# EAGLE board APU_Motherboard_Footprint (EAGLE 9.7.0)
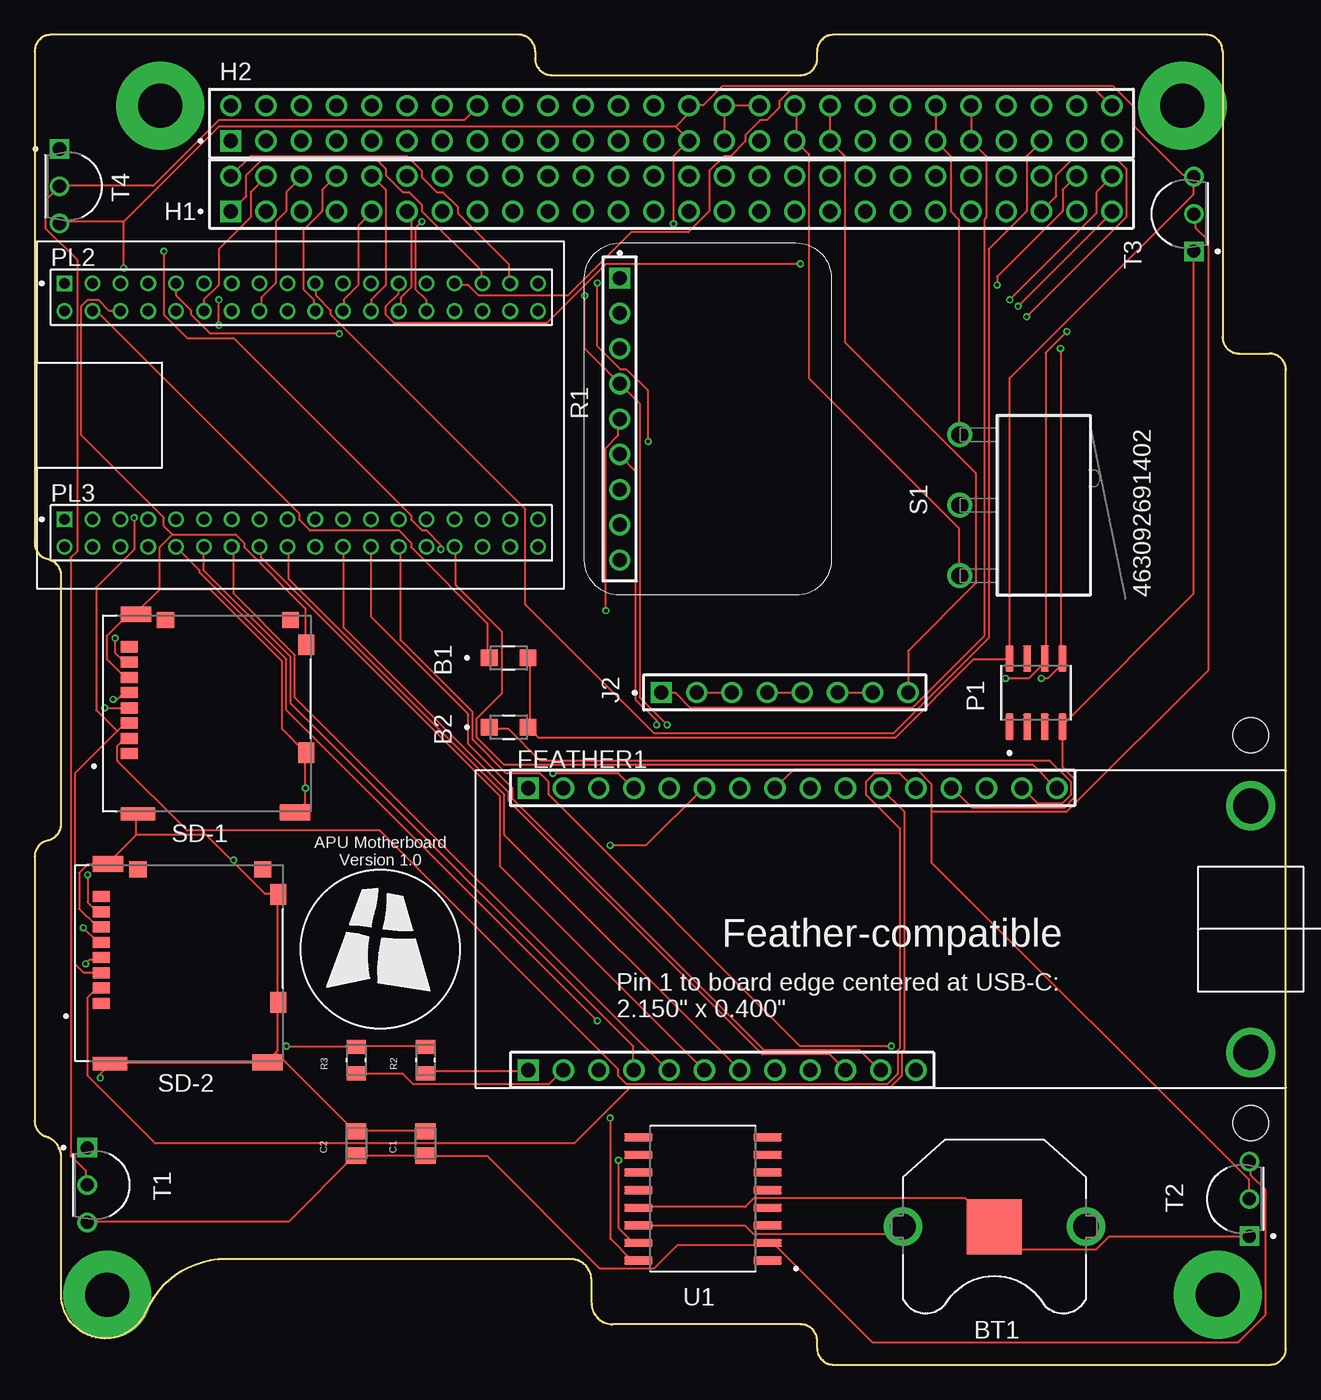
[diagram p0: board, top side]
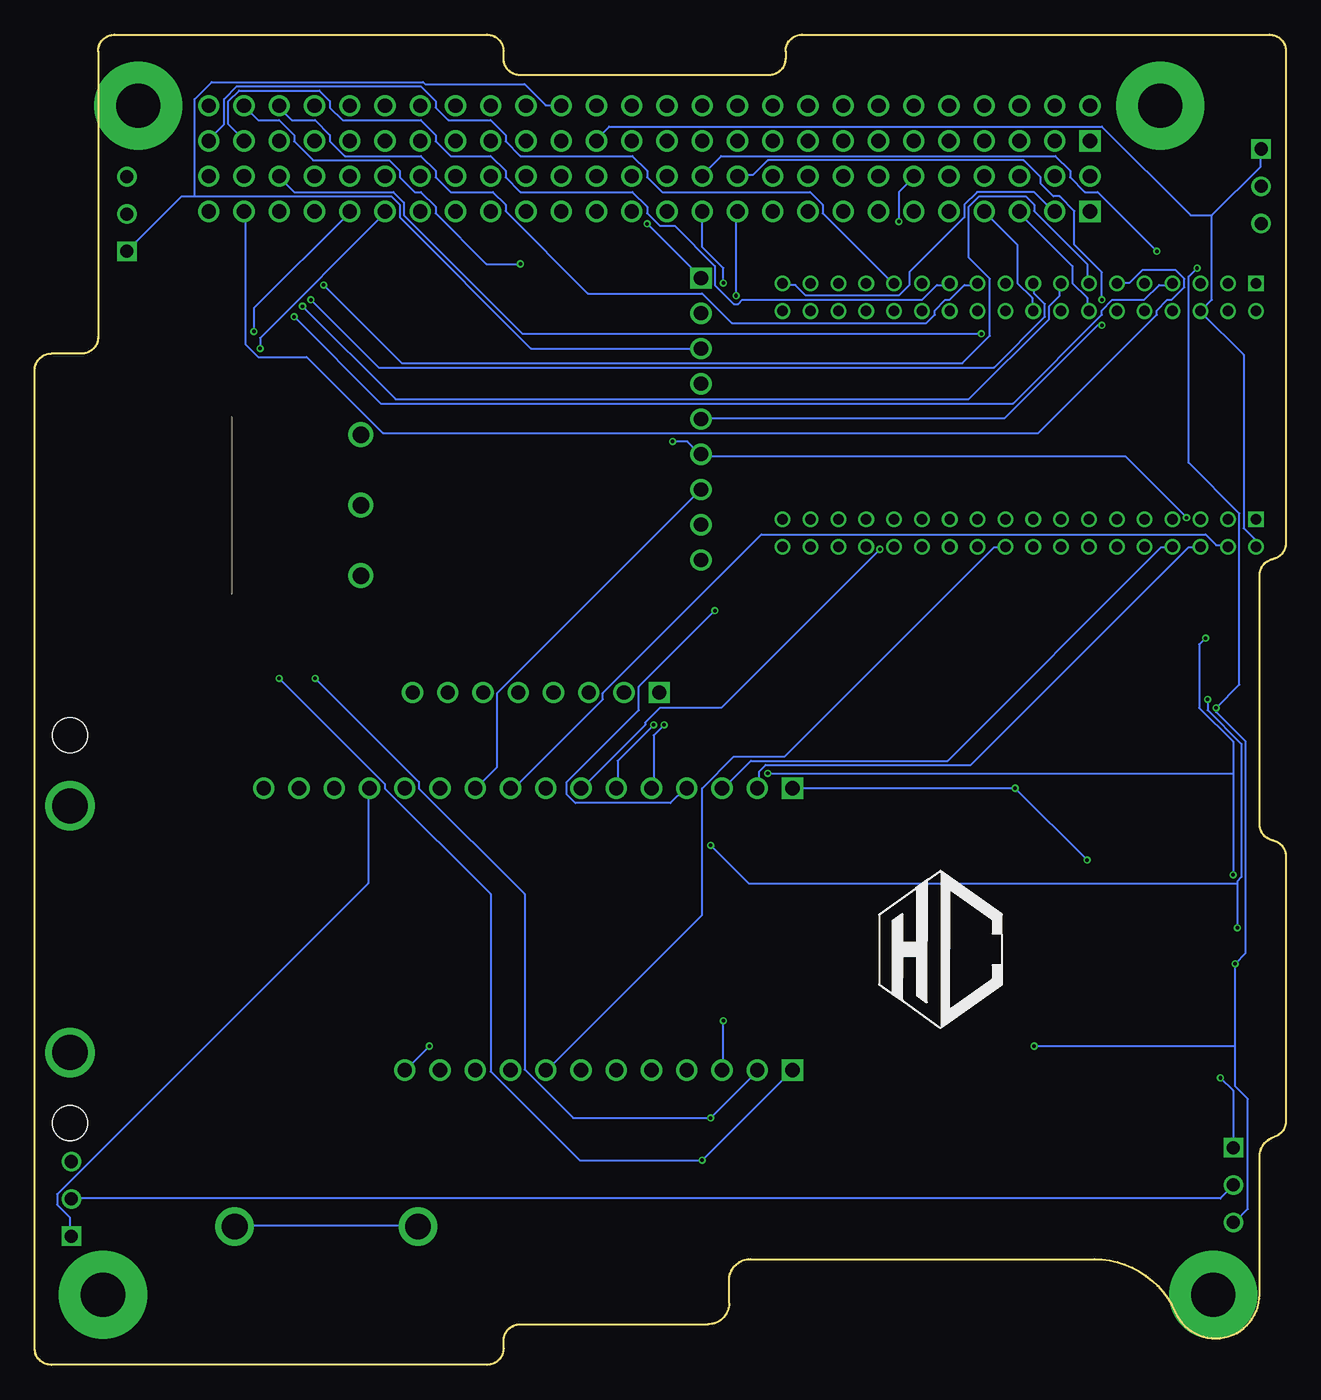
[diagram p1: board, bottom side, seen from below]

Size 90.17 x 95.89 mm. Coordinates in mm from the lower left corner, seen from the top.
Outline: 40.13,4.45 arc90 41.65,2.92 55.19,2.92 arc-90 56.39,1.73 56.39,1.19 arc90 57.58,0 88.98,0 arc90 90.17,1.19 90.17,71.7 arc90 88.98,72.9 86.79,72.9 arc-90 85.6,74.09 85.6,94.69 arc90 84.4,95.88 57.58,95.88 arc90 56.39,94.69 56.39,94.16 arc-90 55.19,92.96 37.26,92.96 arc-90 36.07,94.16 36.07,94.69 arc90 34.87,95.88 1.19,95.88 arc90 0,94.69 0,59.25 arc78 0.95,58.08 arc-78 1.91,56.91 1.91,38.98 arc-78 0.95,37.81 arc78 0,36.64 0,17.58 arc73 0.84,16.44 arc-73 1.91,14.99 1.91,5.08 arc156 7.99,3.81 arc-66 13.81,7.62 38.61,7.62 arc-90 40.13,6.1 40.13,4.45
Copper layers (1*16): Top 0.035559375mm / dielectric 1.6mm / Bottom 0.035559375mm
Design rules "oshpark-2layer": minimum track width 6mil, minimum drill 10mil, track to track 6mil, track to pad 6mil, pad to pad 6mil, via to via 6mil, smd to smd 6mil, copper to edge 15mil, drill to drill 6mil, minimum pad ring 5mil, minimum via ring 5mil, stop-mask expansion 2.5mil, vias tented up to drill 0mil, thermal gap 10mil

## Footprints (pad centres in the part's own frame; a part is rotated, then mirrored left to right if it is on the bottom)
PMEG120G10ELRX = smd 1.2 x 1.2: 1 -1.4,0; 2 1.4,0
BAT_BK-890 = smd 3.96 x 3.96: - 0,0 | drill 1.85: S1+ -6.6,0; S2+ 6.6,0
CAPC2012X94N = smd 1.16 x 1.47: 1 -0.88,0; 2 0.88,0
FEATHER = drill 1.02 pad 1.37 square: B1 0,0; T1 0,20.32 | drill 1.02 pad 1.37: B2 2.54,0; B3 5.08,0; B4 7.62,0; B5 10.16,0; B6 12.7,0; B7 15.24,0; B8 17.78,0; B9 20.32,0; B10 22.86,0; B11 25.4,0; B12 27.94,0; T2 2.54,20.32; T3 5.08,20.32; T4 7.62,20.32; T5 10.16,20.32; T6 12.7,20.32; T7 15.24,20.32; T8 17.78,20.32; T9 20.32,20.32; T10 22.86,20.32; T11 25.4,20.32; T12 27.94,20.32; T13 30.48,20.32; T14 33.02,20.32; T15 35.56,20.32; T16 38.1,20.32 | drill 2.54: MT1 52.07,19.05; MT2 52.07,1.27 | hole 2.54: 52.07,24.13; 52.07,-3.81
SAMTEC_ESQ-126-37-G-D--NUMBERED-FOR-CUBESAT-BUS = drill 1.02 pad 1.37 square: 01 0,0 | drill 1.02 pad 1.37: 02 0,2.54; 03 2.54,0; 04 2.54,2.54; 05 5.08,0; 06 5.08,2.54; 07 7.62,0; 08 7.62,2.54; 09 10.16,0; 10 10.16,2.54; 11 12.7,0; 12 12.7,2.54; 13 15.24,0; 14 15.24,2.54; 15 17.78,0; 16 17.78,2.54; 17 20.32,0; 18 20.32,2.54; 19 22.86,0; 20 22.86,2.54; 21 25.4,0; 22 25.4,2.54; 23 27.94,0; 24 27.94,2.54; 25 30.48,0; 26 30.48,2.54; 27 33.02,0; 28 33.02,2.54; 29 35.56,0; 30 35.56,2.54; 31 38.1,0; 32 38.1,2.54; 33 40.64,0; 34 40.64,2.54; 35 43.18,0; 36 43.18,2.54; 37 45.72,0; 38 45.72,2.54; 39 48.26,0; 40 48.26,2.54; 41 50.8,0; 42 50.8,2.54; 43 53.34,0; 44 53.34,2.54; 45 55.88,0; 46 55.88,2.54; 47 58.42,0; 48 58.42,2.54; 49 60.96,0; 50 60.96,2.54; 51 63.5,0; 52 63.5,2.54
SAMTEC_TSW-108-05-G-S = drill 1.02 pad 1.37 square: 01 0,0 | drill 1.02 pad 1.37: 02 2.54,0; 03 5.08,0; 04 7.62,0; 05 10.16,0; 06 12.7,0; 07 15.24,0; 08 17.78,0
MT_125_250 = drill 3.175 pad 6.35: 1 0,0
SOIC127P600X175-8N = smd 1.9 x 0.6: 1 -2.455,1.905; 2 -2.455,0.635; 3 -2.455,-0.635; 4 -2.455,-1.905; 5 2.455,-1.905; 6 2.455,-0.635; 7 2.455,0.635; 8 2.455,1.905
TE_4-1734506-1 = drill 0.75 pad 1.1 square: 1 0,0 | drill 0.75 pad 1.1: 2 0,-2; 3 2.007,0; 4 2.007,-2; 5 4.013,0; 6 4.013,-2; 7 6.02,0; 8 6.02,-2; 9 8.026,0; 10 8.026,-2; 11 10.033,0; 12 10.033,-2; 13 12.04,0; 14 12.04,-2; 15 14.046,0; 16 14.046,-2; 17 16.053,0; 18 16.053,-2; 19 18.059,0; 20 18.059,-2; 21 20.066,0; 22 20.066,-2; 23 22.073,0; 24 22.073,-2; 25 24.079,0; 26 24.079,-2; 27 26.086,0; 28 26.086,-2; 29 28.092,0; 30 28.092,-2; 31 30.099,0; 32 30.099,-2; 33 32.106,0; 34 32.106,-2; 35 34.112,0; 36 34.112,-2
FRAM_ADAFRUIT_MB85RSMT = drill 1.02 pad 1.37 square: 01 -0.381,0 | drill 1.02 pad 1.37: 02 2.159,0; 03 4.699,0; 04 7.239,0; 05 9.779,0; 06 12.319,0; 07 14.859,0; 08 17.399,0; 09 19.939,0
RESC2012X65N = smd 1.01 x 1.38: 1 -0.95,0; 2 0.95,0
463092691402 = drill 1.2: 1 -5.08,0; 2 0,0; 3 5.08,0
MOLEX_503182-1852 = smd 0.8 x 1.24: 1 -2.9,6.355; 2 -1.8,6.355; 3 -0.7,6.355; 4 0.4,6.355; 5 1.5,6.355; 6 2.6,6.355; 7 3.7,6.355; 8 4.8,6.355 | smd 1.16 x 1.2: DT 6.74,-5.275 | smd 0.95 x 2.5: P1 -7.245,5.725 | smd 1.15 x 2.2: P2 7.145,5.875; P3 -7.145,-5.605 | smd 1.5 x 1.15: P4 -2.84,-6.4; P5 4.94,-6.4 | smd 1.16 x 1.25: SW 6.74,3.725
DS18B20+T&R = drill 0.94 pad 1.41 square: 1 -2.69,-1.37 | drill 0.94 pad 1.41: 2 0,-1.37; 3 2.69,-1.37
SOIC127P1032X265-16N = smd 2.05 x 0.59: 1 -4.655,4.445; 2 -4.655,3.175; 3 -4.655,1.905; 4 -4.655,0.635; 5 -4.655,-0.635; 6 -4.655,-1.905; 7 -4.655,-3.175; 8 -4.655,-4.445; 9 4.655,-4.445; 10 4.655,-3.175; 11 4.655,-1.905; 12 4.655,-0.635; 13 4.655,0.635; 14 4.655,1.905; 15 4.655,3.175; 16 4.655,4.445

## Placement (x,y rotation side)
B1  DIO_PMEG4030ER,115  [PMEG120G10ELRX]  34.16,50.96 0 top
B2  PMEG120G10ELRX  [PMEG120G10ELRX]  34.16,45.96 0 top
BT1  BK-890  [BAT_BK-890]  69.16,9.96 180 top
C1  08053C104KAT2A  [CAPC2012X94N]  28.16,15.96 90 top
C2  08053C105KAT2A  [CAPC2012X94N]  23.16,15.96 90 top
FEATHER1  FEATHER  [FEATHER]  35.56,21.24 0 top
H1  CSK-H1  [SAMTEC_ESQ-126-37-G-D--NUMBERED-FOR-CUBESAT-BUS]  14.13,83.14 0 top
H2  CSK-H2  [SAMTEC_ESQ-126-37-G-D--NUMBERED-FOR-CUBESAT-BUS]  14.13,88.22 0 top
J2  TSW-108-05-G-S  [SAMTEC_TSW-108-05-G-S]  45.16,48.46 0 top
MT1  MOUNTING_HOLE-125_250_ROUND  [MT_125_250]  5.24,5.04 0 top
MT2  MOUNTING_HOLE-125_250_ROUND  [MT_125_250]  85.25,5.04 0 top
MT3  MOUNTING_HOLE-125_250_ROUND  [MT_125_250]  9.05,90.76 0 top
MT4  MOUNTING_HOLE-125_250_ROUND  [MT_125_250]  82.71,90.76 0 top
P1  ATECC608A-SSHDA-B  [SOIC127P600X175-8N]  72.16,48.46 90 top
PL2  [TE_4-1734506-1]  2.16,77.96 0 top
PL3  [TE_4-1734506-1]  2.16,60.96 0 top
R1  FRAM_ADAFRUIT_MB85RSMT  [FRAM_ADAFRUIT_MB85RSMT]  42.16,77.96 270 top
R2  RMCF0805JT10K0  [RESC2012X65N]  28.16,21.96 90 top
R3  RMCF0805JT10K0  [RESC2012X65N]  23.16,21.96 90 top
S1  463092691402  [463092691402]  66.66,61.96 270 top
SD-1  503182-1852  [MOLEX_503182-1852]  13.16,46.96 90 top
SD-2  503182-1852  [MOLEX_503182-1852]  11.16,28.96 90 top
T1  DS18B20  [DS18B20+T&R]  5.16,12.96 270 top
T2  DS18B20  [DS18B20+T&R]  86.16,11.96 90 top
T3  DS18B20  [DS18B20+T&R]  82.16,82.96 90 top
T4  DS18B20  [DS18B20+T&R]  3.16,84.96 270 top
U1  DS3231M+TRL  [SOIC127P1032X265-16N]  48.16,11.96 180 top
U$1  [APU-LOGO]  24.91,29.96 0 top
U$2  [NATHANAEL-LOGO]  24.91,29.96 0 bottom

## Library data of the parts
B1 B2 FEATHER1 H1 H2 MT1-MT4 PL2 PL3 R1 T1-T4 = apu-csk-motherboard
BT1 = apu-csk-motherboard; AVAILABILITY: In Stock; DESCRIPTION: BATTERY RETAINER COIN PC PIN; MF: MPD; MP: BK-890; PACKAGE: DFN-12 MPD; PRICE: None; PURCHASE-URL: https://pricing.snapeda.com/search/part/BK-890/?ref=eda
C1 = apu-csk-motherboard; AVAILABILITY: In Stock; DESCRIPTION: 0.1 µF ±10% 25V Ceramic Capacitor X7R 0805 (2012 Metric); MF: AVX; MP: 08053C104KAT2A; PACKAGE: 2012 AVX; PRICE: None; PURCHASE-URL: https://pricing.snapeda.com/search/part/08053C104KAT2A/?ref=eda
C2 = apu-csk-motherboard; AVAILABILITY: In Stock; DESCRIPTION: 1 µF ±10% 25V Ceramic Capacitor X7R 0805 (2012 Metric); MF: AVX; MP: 08053C105KAT2A; PACKAGE: 2012 AVX; PRICE: None; PURCHASE-URL: https://pricing.snapeda.com/search/part/08053C105KAT2A/?ref=eda
J2 = apu-csk-motherboard; AVAILABILITY: In Stock; DESCRIPTION: TSW - Samtec 2.54mm Pin Header 8.51mm Overall Pin Length (05) - Fast Stock; MF: Samtec; MP: TSW-108-05-G-S; PACKAGE: None; PRICE: None; PURCHASE-URL: https://pricing.snapeda.com/search/part/TSW-108-05-G-S/?ref=eda
P1 = apu-csk-motherboard; AVAILABILITY: In Stock; DESCRIPTION: IC AUTHENTICATION CHIP 8SOIC; MF: Microchip Technology; MP: ATECC608A-SSHDA-B; PACKAGE: SOIC-8 Microchip Technology; PRICE: None; PURCHASE-URL: https://pricing.snapeda.com/search/part/ATECC608A-SSHDA-B/?ref=eda
R2 R3 = apu-csk-motherboard; AVAILABILITY: In Stock; DESCRIPTION: 10 kOhms ±5% 0.125W, 1/8W Chip Resistor 0805 (2012 Metric) Automotive AEC-Q200 Thick Film; MF: Stackpole Electronics Inc; MP: RMCF0805JT10K0; PACKAGE: 2012 Stackpole; PRICE: None; PURCHASE-URL: https://pricing.snapeda.com/search/part/RMCF0805JT10K0/?ref=eda
S1 = apu-csk-motherboard; AVAILABILITY: In Stock; DESCRIPTION: Basic / Snap Action Switches WS-MITV Micro Switch RA Psh Typ 80gf; MF: Würth Elektronik; MP: 463092691402; PACKAGE: None; PRICE: None; PURCHASE-URL: https://pricing.snapeda.com/search/part/463092691402/?ref=eda
SD-1 SD-2 = apu-csk-motherboard; AVAILABILITY: In Stock; DESCRIPTION: 10 (8 + 2) Position Card Connector Secure Digital - microSD™ Surface Mount, Right Angle Gold; MF: Molex; MP: 5031821852; PACKAGE: None; PRICE: None; PURCHASE-URL: https://pricing.snapeda.com/search/part/5031821852/?ref=eda
U1 = apu-csk-motherboard; AVAILABILITY: In Stock; DESCRIPTION: ±5ppm, I2C Real-Time Clock; MF: Analog Devices; MP: DS3231M+TRL; PACKAGE: SOIC-16 Maxim; PRICE: None; PURCHASE-URL: https://pricing.snapeda.com/search/part/DS3231M+TRL/?ref=eda
U$1 = APU-LOGO
U$2 = NATHANAEL-LOGO

## Nets
3.3V: B1.2 B2.2 C1.1 C2.1 H2.27 H2.28 P1.8 R1.01 R2.2 R3.2 SD-1.4 SD-2.4 T1.3 T2.3 T3.3 T4.3 U1.2
CIPO: FEATHER1.T4 H1.22 R1.05 SD-1.7 SD-2.7
COPI: FEATHER1.T5 H1.23 R1.06 SD-1.3 SD-2.3
CS-FLIR: FEATHER1.T7 H1.24
CS-FPGA: FEATHER1.T9 PL3.4
CS-FRAM: FEATHER1.T10 R1.07
CS-SD-1: FEATHER1.T12 SD-1.2
CS-SD-2: FEATHER1.T11 SD-2.2
D0: H2.47 PL2.19
D1: H2.48 PL2.21
D2: H2.49 PL2.23
D3: H2.50 PL2.25
DQ-TEMP: FEATHER1.T8 H2.16 T1.2 T2.2 T3.2 T4.2
FE_EN: FEATHER1.B11 PL3.24
FE_IO0: FEATHER1.B3 PL3.10
FE_IO1: FEATHER1.B4 PL3.12
FE_IO2: FEATHER1.B5 PL3.14
FE_IO9: FEATHER1.B6 PL3.16
FE_IO10: FEATHER1.B7 PL3.18
FE_IO11: FEATHER1.B8 PL3.20
FE_RESET: FEATHER1.T16 PL3.30
FE_V_BATT: FEATHER1.B12 PL3.26
FE_V_USB: FEATHER1.B10 PL3.22
FPGA3.3: B1.1 PL2.4
GND: BT1.- C1.2 C2.2 FEATHER1.T1 FEATHER1.T13 H2.29 H2.30 H2.32 P1.4 PL2.6 PL3.2 R1.03 SD-1.6 SD-1.P1 SD-1.P2 SD-1.P3 SD-1.P4 SD-1.P5 SD-2.6 SD-2.P1 SD-2.P2 SD-2.P3 SD-2.P4 SD-2.P5 T1.1 T2.1 T3.1 T4.1 U1.13
GPIO-0: H1.47 PL2.7
GPIO-1: H1.48 PL2.9
GPIO-2: H1.49 PL2.11
GPIO-3: H1.50 PL2.13
HSYNC: H2.52 PL2.29
INT: H1.02 PL2.33
LS_C: H2.43 H2.44 J2.01
LS_NC: H2.35 H2.36 J2.08
N$1: BT1.S1+ BT1.S2+ U1.14
N$3: J2.02 J2.03
N$4: J2.04 J2.05
N$5: J2.06 J2.07
PCLKO: H1.01 PL2.31
PW_DWN_L: H1.51 PL2.15
RBF_C: H2.41 H2.42 S1.1
RBF_NC: H2.33 H2.34 S1.3
RESET_L: H1.52 PL2.17
SCK: FEATHER1.T6 H1.21 R1.04 SD-1.5 SD-2.5
SCL: FEATHER1.B2 H1.43 P1.6 R3.1 U1.16
SDA: FEATHER1.B1 H1.41 P1.5 R2.1 U1.15
TRIG: H1.03 PL2.35
UC3.3: B2.1 FEATHER1.T15
UC_RXO: FEATHER1.T3 PL3.8
UC_TXO: FEATHER1.T2 PL3.6
USER15: H1.04 PL2.12
USER16: H1.05 PL2.14
USER17: H1.06 PL2.16
USER18: H1.07 PL2.18
USER19: H1.08 PL2.20
USER20: H1.09 PL2.22
USER21: H1.10 PL2.24
USER22: H1.11 PL2.26
USER23: H1.12 PL2.28
VSYNC: H2.51 PL2.27

## Tracks (layer width: path | path; a pad name or v marks a point on that pad's centre or on a via)
3.3V  (via drill 0.25)
  Top 0.152: 6.41,82.41 1.84,82.41 T4.3 | 6.41,82.41 13.27,89.27 46.18,89.27 | 46.18,89.27 47.1,88.35 H2.27 47.1,88.2 46.03,87.13 v46.03,82.26 | 46.18,89.27 47.1,90.18 47.1,90.64 H2.28 47.25,90.79 48.17,90.79 49.54,92.16 77.73,92.16 79.26,90.64 79.26,89.27 82.76,85.76 83.52,85.76 T3.3 83.52,85.61 83.52,84.39 70.26,71.13 70.26,51.01 P1.8 70.11,50.86 67.67,50.86 62.03,45.22 36.28,45.22 35.67,45.83 B2.2 35.67,45.98 35.67,50.86 B1.2 | R2.2 28.05,22.97 23.17,22.97 R3.2 23.02,22.97 v18.14,22.97 | v3.66,28.92 3.97,29.22 4.73,29.22 SD-2.4 | v5.04,47.36 6.71,47.36 SD-1.4 | T2.3 87.64,14.59 87.64,13.68 88.7,12.61 88.7,3.62 86.72,1.64 60.36,1.64 53.35,8.65 52.89,8.65 U1.2 52.74,8.65 46.34,8.65 44.66,6.97 40.7,6.97 32.62,15.05 28.2,15.05 C1.1 28.05,15.05 23.17,15.05 C2.1 23.02,15.05 18.3,10.32 3.82,10.32 T1.3 | v6.41,79.06 6.41,82.41
  Bottom 0.152: v46.03,82.26 42.22,78.45 R1.01 | 3.66,22.97 3.66,20.08 2.75,19.16 2.75,11.24 3.66,10.32 T1.3 | 3.66,22.97 v3.66,28.92 2.9,29.68 2.9,44.92 5.04,47.05 v5.04,47.36 3.36,49.03 3.36,61.38 7.02,65.03 7.02,78.45 v6.41,79.06 | 3.66,22.97 v18.14,22.97
CIPO  (via drill 0.25)
  Top 0.152: v3.82,35.32 3.82,33.34 4.43,32.73 4.73,32.73 SD-2.7 | v5.8,52.39 5.8,51.32 6.41,50.71 6.71,50.71 SD-1.7 | v41.16,54.37 41.16,66.1 42.07,67.02 42.07,68.08 R1.05 | v37.35,42.63 42.07,42.63 43.14,41.56 FEATHER1.T4 | v13.27,74.94 v13.27,76.77
  Bottom 0.152: 3.82,42.63 3.82,44.92 6.26,47.36 6.26,51.93 v5.8,52.39 | 3.82,42.63 v3.82,35.32 | v41.16,54.37 46.64,48.88 46.64,47.2 51.82,42.02 51.82,41.11 51.21,40.5 44.36,40.5 43.29,41.56 FEATHER1.T4 | v37.35,42.63 3.82,42.63 | v13.27,76.77 13.27,78.75 15.25,80.73 15.25,83.17 16.31,84.24 16.77,84.24 17.69,85.15 17.69,85.61 18.9,86.83 37.35,86.83 38.41,85.76 39.48,85.76 H1.22 | v13.27,74.94 13.57,74.94 20.28,68.23 42.07,68.23 R1.05
COPI  (via drill 0.25)
  Top 0.152: 5.95,45.68 6.41,46.14 6.71,46.14 SD-1.3 | 5.95,45.68 2.9,42.63 2.9,28.92 3.51,28.31 4.73,28.31 SD-2.3 | v44.81,46.14 44.81,46.44 43.29,47.97 43.29,64.42 42.22,65.49 R1.06 | 5.95,45.68 4.43,47.2 4.43,56.04 7.17,58.79 v7.17,61.07 | v40.55,77.99 40.55,73.42 42.22,71.74 42.68,71.74 44.2,70.22 v44.2,66.56
  Bottom 0.152: v44.81,46.14 45.57,45.37 45.57,41.56 FEATHER1.T5 | v7.17,61.07 11.59,65.49 42.07,65.49 R1.06 42.22,65.64 43.14,66.56 v44.2,66.56 | H1.23 42.07,80.58 40.55,79.06 v40.55,77.99
CS-FLIR  (via drill 0.25)
  Top 0.152: v29.27,58.79 29.27,59.09 28.2,60.16 27.9,60.16 27.13,60.92 27.13,61.22 14.33,74.03 10.98,74.03 9.3,75.7 v9.3,80.27
  Bottom 0.152: v29.27,58.79 40.7,47.36 45.12,47.36 46.18,46.29 46.18,46.14 50.76,41.56 FEATHER1.T7 | v9.3,80.27 13.57,84.54 14.49,84.54 15.55,85.61 15.55,86.07 16.62,87.13 40.7,87.13 42.07,85.76 H1.24
CS-FPGA
  Bottom 0.152: FEATHER1.T9 55.63,41.56 49.23,47.97 49.23,48.42 37.8,59.85 5.8,59.85 5.04,59.09 4.27,59.09 PL3.4
CS-FRAM
  Bottom 0.152: R1.07 42.22,63.05 56.85,48.42 56.85,43.09 58.38,41.56 FEATHER1.T10
CS-SD-1
  Top 0.152: SD-1.2 6.71,45.07 6.41,45.07 5.95,44.61 5.95,43.55 10.98,38.52 24.85,38.52 42.07,21.3 42.07,20.84 42.68,20.23 61.42,20.23 62.19,20.99 62.19,22.67 62.34,22.82 62.34,38.67 59.9,41.11 59.9,42.02 60.51,42.63 62.34,42.63 63.41,41.56 FEATHER1.T12
CS-SD-2
  Top 0.152: SD-2.2 4.73,27.09 4.43,27.09 3.82,26.48 3.82,20.84 8.69,15.96 38.87,15.96 42.83,19.92 61.58,19.92 62.49,20.84 62.49,22.51 62.64,22.67 62.64,39.89 FEATHER1.T11
D0
  Top 0.152: PL2.19 20.28,77.84 20.28,77.07 21.34,76.01 21.34,75.7 35.36,61.68 35.36,54.82 44.66,45.53 61.88,45.53 68.74,52.39 68.74,80.43 71.48,83.17 71.48,87.13 72.55,88.2 H2.47
D1
  Bottom 0.152: PL2.21 22.26,77.84 23.17,77.84 24.24,76.77 24.54,76.77 25.31,76.01 25.31,75.7 25.92,75.09 39.94,75.09 42.07,77.23 50.3,77.23 56.24,83.17 56.24,83.63 57.16,84.54 60.21,84.54 61.27,85.61 61.27,86.07 62.34,87.13 67.83,87.13 68.89,88.2 68.89,88.66 69.96,89.72 71.64,89.72 72.55,90.64 H2.48
D2
  Bottom 0.152: PL2.23 24.24,77.84 25.15,77.84 26.22,76.77 39.17,76.77 39.48,76.46 39.78,76.46 41.16,77.84 41.16,79.21 44.05,82.1 45.12,82.1 46.03,83.02 46.03,83.47 47.1,84.54 55.18,84.54 56.24,85.61 56.24,86.07 57.31,87.13 60.21,87.13 61.27,88.2 61.27,88.66 62.34,89.72 67.98,89.72 68.89,90.64 68.89,91.09 69.65,91.86 75.45,91.86 76.21,91.09 76.21,89.42 75.14,88.35 H2.49
D3  (via drill 0.25)
  Top 0.152: v55.18,79.36 41.16,79.36 36.89,75.09 25.92,75.09 25.31,75.7 25.31,76.31 26.22,77.23 26.22,77.84 PL2.25
  Bottom 0.152: v55.18,79.36 57.61,79.36 61.27,83.02 61.27,83.47 62.34,84.54 62.8,84.54 63.86,85.61 63.86,86.07 64.62,86.83 70.11,86.83 71.48,88.2 71.48,88.66 72.55,89.72 74.07,89.72 74.99,90.64 H2.50
DQ-TEMP
  Top 0.152: 64.62,39.89 64.62,41.87 63.56,42.94 54.72,42.94 FEATHER1.T8 | 64.62,39.89 64.62,36.23 87.48,13.37 87.48,12 T2.2 | 64.62,39.89 74.38,39.89 84.59,50.1 84.59,81.04 83.67,81.95 83.67,82.87 T3.2 | H2.16 31.86,90.64 30.94,89.72 13.27,89.72 8.54,85 1.84,85 T4.2 1.68,84.85 0.77,83.93 0.77,81.95 3.06,79.66 3.06,58.63 2.6,58.18 2.6,15.05 3.66,13.98 3.66,13.07 T1.2
  Bottom 0.152: T2.2 87.48,12 4.73,12 3.82,12.91 T1.2
FE_EN
  Top 0.152: PL3.24 24.24,58.94 24.24,53.91 31.25,46.9 31.25,44.77 34.45,41.56 34.45,40.8 52.59,22.67 59.44,22.67 60.81,21.3 FEATHER1.B11
FE_IO0  (via drill 0.25)
  Top 0.152: v40.55,24.8 18.14,47.2 18.14,50.86 11.89,57.11 11.89,57.26 10.22,58.94 PL3.10
  Bottom 0.152: v40.55,24.8 40.55,21.3 FEATHER1.B3
FE_IO1
  Top 0.152: PL3.12 12.2,58.94 12.2,57.26 18.45,51.01 18.45,47.66 43.14,22.97 43.14,21.3 FEATHER1.B4
FE_IO2
  Top 0.152: PL3.14 14.33,58.94 14.33,55.59 18.75,51.17 18.75,48.12 45.57,21.3 FEATHER1.B5
FE_IO9
  Top 0.152: PL3.16 16.31,58.94 16.31,58.18 33.54,40.96 33.54,35.93 48.17,21.3 FEATHER1.B6
FE_IO10
  Top 0.152: PL3.18 18.3,58.94 18.3,56.65 33.84,41.11 33.84,38.21 50.76,21.3 FEATHER1.B7
FE_IO11
  Bottom 0.152: PL3.20 20.28,58.94 21.04,58.94 36.13,43.85 39.78,43.85 42.07,41.56 42.07,32.42 53.19,21.3 FEATHER1.B8
FE_RESET
  Top 0.152: PL3.30 30.33,58.94 30.33,56.2 33.69,52.84 33.69,48.42 31.86,46.59 31.86,45.22 33.84,43.24 71.94,43.24 73.62,41.56 FEATHER1.T16
FE_V_BATT  (via drill 0.25)
  Top 0.152: v61.73,22.97 55.18,22.97 37.04,41.11 37.04,42.02 36.43,42.63 33.99,42.63 31.55,45.07 31.55,47.05 26.37,52.23 26.37,58.94 PL3.26
  Bottom 0.152: v61.73,22.97 63.41,21.3 FEATHER1.B12
FE_V_USB
  Top 0.152: PL3.22 22.26,58.94 22.26,53.15 34.14,41.26 34.14,40.65 52.43,22.36 57.31,22.36 58.38,21.3 FEATHER1.B10
FPGA3.3
  Top 0.152: B1.1 32.62,51.01 32.62,53.45 27.13,58.94 27.13,59.24 26.22,60.16 19.82,60.16 19.06,60.92 19.06,61.38 4.58,75.85 4.27,75.85 PL2.4
GND  (via drill 0.25)
  Top 0.152: SD-2.6 4.73,31.66 4.43,31.66 3.21,32.88 3.21,35.47 3.82,36.08 5.19,36.08 SD-2.P2 5.34,36.23 7.32,38.21 | 7.32,38.21 7.32,39.58 SD-1.P1 | C1.2 28.05,16.88 23.17,16.88 C2.2 23.02,16.88 17.38,22.51 | 17.38,22.51 16.77,21.91 SD-2.P3 16.62,21.75 5.49,21.75 SD-2.P1 5.34,21.6 4.73,20.99 v4.73,20.69 | 17.38,22.51 17.53,22.67 17.53,26.02 SD-2.P4 17.53,26.17 17.53,33.79 SD-2.P5 17.53,33.94 16.62,33.94 14.33,36.23 | 7.32,38.21 12.35,38.21 14.33,36.23 | SD-1.6 6.71,49.64 6.41,49.64 5.19,50.86 5.19,52.54 6.71,54.06 7.17,54.06 SD-1.P2 7.32,54.21 9,55.89 | 9.91,59.85 14.49,59.85 15.09,59.24 15.09,58.94 19.51,54.52 19.51,51.93 SD-1.P5 | 9.91,59.85 9,58.94 9,55.89 | SD-1.P3 18.9,39.89 19.51,40.5 v19.51,41.56 19.51,44 SD-1.P4 19.51,44.16 17.84,45.83 17.84,50.71 12.66,55.89 9,55.89 | 9.91,59.85 9.3,60.46 9.3,61.07 3.36,67.02 3.36,76.31 3.82,76.77 4.58,76.77 5.34,76.01 6.1,76.01 PL2.6 | v14.33,36.38 14.33,36.23 | U1.13 43.59,11.39 51.21,11.39 51.82,12 67.06,12 69.04,10.02 BT1.- 69.2,9.87 70.72,8.34 76.51,8.34 77.43,9.26 87.48,9.26 T2.1 | H2.29 H2.30 49.69,90.79 52.13,90.79 H2.32 | FEATHER1.T13 66.15,41.56 67.52,40.19 74.23,40.19 74.99,40.96 74.99,42.17 74.07,43.09 74.07,45.98 P1.4 74.07,46.14 83.52,55.59 83.52,80.12 T3.1
  Bottom 0.152: v4.73,20.69 3.82,19.77 3.82,15.66 T1.1 | PL3.2 2.29,59.09 2.29,59.55 3.06,60.31 3.06,72.81 6.1,75.85 PL2.6 6.1,76.01 5.34,76.77 5.34,82.87 | 5.34,82.87 1.84,86.37 1.84,87.59 T4.1 | FEATHER1.T1 v19.51,41.56 v14.33,36.38 | 78.65,84.24 79.56,84.24 T3.1 | 78.65,84.24 64.47,84.24 63.86,83.63 63.86,82.71 54.41,73.26 42.22,73.26 R1.03 | 78.65,84.24 78.65,91.25 77.43,92.47 62.19,92.47 62.03,92.31 54.87,92.31 53.35,90.79 52.28,90.79 H2.32 | T2.1 87.64,9.41 87.64,10.63 88.55,11.54 88.55,12.3 66.15,34.71 66.15,41.56 FEATHER1.T13 | 5.34,82.87 6.87,82.87 13.27,89.27 48.78,89.27 49.69,88.35 H2.29
GPIO-0  (via drill 0.25)
  Top 0.152: v71.48,75.55 78.65,82.71 78.65,86.22 78.04,86.83 74.68,86.83 73.62,85.76 73.62,84.24 72.55,83.17 H1.47
  Bottom 0.152: v71.48,75.55 65.23,69.3 19.67,69.3 13.27,75.7 13.27,76.01 12.5,76.77 10.22,76.77 9.15,77.84 8.24,77.84 PL2.7
GPIO-1  (via drill 0.25)
  Top 0.152: v21.95,74.33 12.66,74.33 11.28,75.7 11.28,76.01 10.22,77.07 10.22,77.84 PL2.9
  Bottom 0.152: v21.95,74.33 55.02,74.33 63.56,82.87 63.56,83.78 64.32,84.54 71.48,84.54 72.55,85.61 H1.48
GPIO-2
  Bottom 0.152: PL2.11 12.05,77.99 11.28,77.99 10.37,78.9 7.93,78.9 7.32,78.29 7.32,77.68 8.24,76.77 8.54,76.77 9.3,76.01 9.3,75.7 17.84,67.17 65.08,67.17 70.57,72.65 74.07,72.65 74.99,73.57 74.99,83.02 H1.49
GPIO-3  (via drill 0.25)
  Top 0.152: v69.35,77.84 69.35,78.45 74.07,83.17 74.07,84.69 74.99,85.61 H1.50
  Bottom 0.152: v69.35,77.84 63.71,72.2 23.32,72.2 21.34,74.18 21.34,78.29 22.87,79.82 22.87,83.47 22.11,84.24 18.75,84.24 18.14,83.63 18.14,83.17 14.33,79.36 14.33,77.99 PL2.13
HSYNC
  Top 0.152: PL2.29 30.33,77.84 31.25,77.84 32.01,77.07 38.41,77.07 42.98,81.65 47.1,81.65 48.62,83.17 48.62,86.07 49.69,87.13 50.15,87.13 51.21,88.2 51.21,88.66 52.28,89.72 52.74,89.72 53.65,90.64 53.65,91.09 54.41,91.86 76.51,91.86 77.58,90.79 H2.52
INT
  Top 0.152: H1.02 14.18,85.76 15.55,87.13 26.83,87.13 27.9,86.07 27.9,85.61 28.96,84.54 29.42,84.54 30.49,83.47 30.49,83.02 34.14,79.36 34.14,77.99 PL2.33
LS_C
  Top 0.152: J2.01 45.27,48.42 46.18,48.42 47.25,47.36 63.25,47.36 68.43,52.54 68.43,82.56 68.59,82.71 68.59,87.13 67.52,88.2 H2.43 67.52,88.35 67.52,90.64 H2.44
LS_NC
  Top 0.152: H2.36 H2.35 57.31,88.2 58.38,87.13 58.38,73.72 67.83,64.27 67.83,56.35 62.95,51.47 62.95,48.58 J2.08
N$1
  Top 0.152: U1.14 43.59,10.02 51.21,10.02 51.82,9.41 62.03,9.41 62.49,9.87 BT1.S2+
  Bottom 0.152: BT1.S1+ 75.75,10.02 62.64,10.02 BT1.S2+
N$3
  Top 0.152: J2.02 47.71,48.42 50.15,48.42 J2.03
N$4
  Top 0.152: J2.04 52.89,48.42 55.18,48.42 J2.05
N$5
  Top 0.152: J2.06 57.92,48.42 60.36,48.42 J2.07
PCLKO
  Top 0.152: PL2.31 32.16,77.99 32.16,78.9 27.9,83.17 27.9,83.63 26.98,84.54 26.52,84.54 25.31,85.76 25.31,86.22 24.7,86.83 16.31,86.83 15.25,85.76 15.25,84.24 14.18,83.17 H1.01
PW_DWN_L  (via drill 0.25)
  Top 0.152: v70.87,76.31 77.58,83.02 H1.51
  Bottom 0.152: v70.87,76.31 64.17,69.61 22.87,69.61 17.08,75.4 17.08,76.31 16.31,77.07 16.31,77.84 PL2.15
RBF_C
  Top 0.152: H2.42 H2.41 64.93,88.2 66,87.13 66,83.17 66.61,82.56 66.61,67.17 S1.1
RBF_NC
  Top 0.152: H2.34 54.87,90.64 54.87,88.35 H2.33 54.87,88.2 55.79,87.28 55.79,71.13 66.61,60.31 66.61,56.96 S1.3
RESET_L  (via drill 0.25)
  Top 0.152: v70.26,76.77 76.51,83.02 76.51,84.54 77.58,85.61 H1.52
  Bottom 0.152: v70.26,76.77 65.39,71.89 21.04,71.89 17.38,75.55 17.38,76.46 18.14,77.23 18.14,77.84 PL2.17
SCK  (via drill 0.25)
  Top 0.152: v3.51,31.51 4.43,30.59 4.73,30.59 SD-2.5 | v5.65,47.97 5.95,47.97 6.41,48.42 6.71,48.42 SD-1.5 | v45.57,46.14 43.59,48.12 43.59,69.3 42.22,70.67 R1.04 42.07,70.83 39.63,73.26 v39.63,77.07 | v41.46,37.45 44.05,37.45 48.17,41.56 FEATHER1.T6
  Bottom 0.152: 3.51,34.71 3.51,34.86 3.21,35.16 3.21,44.77 5.65,47.2 v5.65,47.97 | 3.51,34.71 v3.51,31.51 | v45.57,46.14 48.17,43.55 48.17,41.56 FEATHER1.T6 | v39.63,77.07 39.63,83.02 H1.21 | 3.51,34.71 38.72,34.71 v41.46,37.45
SCL  (via drill 0.25)
  Top 0.152: R3.1 23.17,20.99 26.52,20.99 27.29,20.23 37.04,20.23 37.95,21.14 FEATHER1.B2 | v41.46,17.79 41.46,9.1 42.98,7.58 43.44,7.58 U1.16 | v74.38,74.48 72.85,72.96 72.85,51.01 P1.6 72.7,50.86 72.7,50.56 71.64,49.49 v69.96,49.49
  Bottom 0.152: FEATHER1.B2 38.11,21.14 v41.46,17.79 51.37,17.79 54.87,21.3 54.87,33.94 62.49,41.56 62.49,42.02 v69.96,49.49 | v74.38,74.48 74.38,76.16 67.52,83.02 H1.43
SDA  (via drill 0.25)
  Top 0.152: R2.1 28.2,21.14 35.52,21.14 FEATHER1.B1 | v42.07,14.74 42.07,9.87 43.14,8.8 43.44,8.8 U1.15 | v73.92,73.26 73.92,51.01 P1.5 73.92,50.86 73.92,50.4 73.01,49.49 v72.55,49.49
  Bottom 0.152: FEATHER1.B1 35.67,21.14 v42.07,14.74 50.91,14.74 57.31,21.14 57.31,33.94 64.93,41.56 64.93,41.87 v72.55,49.49 | v73.92,73.26 73.92,74.03 64.93,83.02 H1.41
TRIG
  Bottom 0.152: H1.03 16.77,83.17 18.14,84.54 22.26,84.54 23.17,83.63 23.17,82.71 27.13,78.75 27.13,77.84 27.9,77.07 34.6,77.07 35.36,77.84 36.13,77.84 PL2.35
UC3.3
  Top 0.152: B2.1 32.77,45.83 34.14,45.83 36.43,43.55 73.16,43.55 74.68,42.02 74.68,41.11 74.07,40.5 72.24,40.5 71.18,41.56 FEATHER1.T15
UC_RXO
  Bottom 0.152: PL3.8 8.24,58.94 9,58.94 24.39,43.55 38.56,43.55 40.55,41.56 FEATHER1.T3
UC_TXO
  Bottom 0.152: PL3.6 6.26,58.94 7.02,58.94 22.71,43.24 37.5,43.24 37.95,42.78 37.95,41.56 FEATHER1.T2
USER15
  Top 0.152: PL2.12 12.2,76.01 12.2,76.77 13.27,77.84 13.27,80.43 15.55,82.71 15.55,84.54 16.62,85.61 H1.04
USER16
  Bottom 0.152: PL2.14 14.33,76.01 14.33,76.92 15.4,77.99 15.4,79.21 19.21,83.02 H1.05
USER17
  Top 0.152: PL2.16 16.31,76.01 16.31,76.92 17.38,77.99 17.38,82.41 18.14,83.17 18.14,84.54 19.21,85.61 H1.06
USER18
  Bottom 0.152: PL2.18 18.3,76.01 18.3,76.92 19.36,77.99 19.36,80.73 21.65,83.02 H1.07
USER19
  Top 0.152: PL2.20 20.12,76.01 20.12,76.77 19.36,77.53 19.36,81.8 20.73,83.17 20.73,84.69 21.65,85.61 H1.08
USER20
  Top 0.152: PL2.22 22.26,76.01 22.26,76.77 23.32,77.84 23.32,82.1 24.24,83.02 H1.09
USER21
  Top 0.152: PL2.24 24.24,76.01 24.24,76.77 25.31,77.84 25.31,84.69 24.39,85.61 H1.10
USER22
  Top 0.152: PL2.26 26.37,76.01 26.37,76.92 27.13,77.68 27.13,82.71 26.83,83.02 H1.11
USER23  (via drill 0.25)
  Top 0.152: v27.9,82.41 27.44,81.95 27.44,77.53 28.2,76.77 28.2,76.01 PL2.28
  Bottom 0.152: v27.9,82.41 27.9,84.54 26.83,85.61 H1.12
VSYNC
  Bottom 0.152: PL2.27 28.35,77.99 33.38,83.02 33.38,83.63 34.3,84.54 44.97,84.54 46.03,85.61 46.03,86.07 47.1,87.13 55.18,87.13 56.24,88.2 56.24,88.66 57.31,89.72 60.36,89.72 61.27,90.64 61.27,91.09 62.34,92.16 75.6,92.16 76.51,91.25 76.51,89.42 77.58,88.35 H2.51

## Text on the board
tPlace: Todo: | RBF Switch | barrel power jack | 3D Parts | Copper Keepout areas
tNames: APU Motherboard / Version 1.0